# EAGLE board Sensores (EAGLE 9.7.0)

Size 168.74 x 66.59 mm. Coordinates in mm from the lower left corner, seen from the top.
Outline: 0,0 168.74,0 168.74,66.59 0,66.59 0,0
Copper layers (1*16): Top 0.035mm / dielectric 1.5mm / Bottom 0.035mm
Design rules "default": minimum track width 6mil, minimum drill 0.35mm, track to track 6mil, track to pad 6mil, pad to pad 6mil, via to via 6mil, smd to smd 6mil, copper to edge 40mil, drill to drill 6mil, minimum pad ring 10mil, minimum via ring 8mil, stop-mask expansion 4mil, vias tented up to drill 0mil, thermal gap 10mil

## Footprints (pad centres in the part's own frame; a part is rotated, then mirrored left to right if it is on the bottom)
LEDRD254W60D565H860B_G = drill 0.981 pad 1.581: 1 -1.27,0; 2 1.27,0
LEDRD254W60D565H860B = drill 0.981 pad 1.581: 1 -1.27,0; 2 1.27,0
28027 = drill 1.016 long: 1 -2.54,0; 2 0,0; 3 2.54,0
RESAD1016W63L850D250B = drill 0.83 pad 1.43: 1 -5.08,0; 2 5.08,0
ARDUINO-UNO-R3-SHIELD = drill 1.016 pad 1.88: 3.3V 24.13,-2.54; 5V 24.13,0; A0 24.13,12.7; A1 24.13,15.24; A2 24.13,17.78; A3 24.13,20.32; A4 24.13,22.86; A5 24.13,25.4; AREF -24.13,-13.97; D2 -24.13,20.32; D3 -24.13,17.78; D4 -24.13,15.24; D5 -24.13,12.7; D6 -24.13,10.16; D7 -24.13,7.62; D8 -24.13,3.81; D9 -24.13,1.27; D10 -24.13,-1.27; D11 -24.13,-3.81; D12 -24.13,-6.35; D13 -24.13,-8.89; GND@0 24.13,2.54; GND@1 24.13,5.08; GND@2 -24.13,-11.43; IOREF 24.13,-7.62; NC 24.13,-10.16; RES 24.13,-5.08; RX -24.13,25.4; SCL -24.13,-19.05; SDA -24.13,-16.51; TX -24.13,22.86; VIN 24.13,7.62

## Placement (x,y rotation side)
D1  GREEN  [LEDRD254W60D565H860B_G]  155.06,34.84 180 top
D2  RED  [LEDRD254W60D565H860B]  162.68,34.84 180 top
PIR1  PIR-SENSOR_28027  [28027]  146.17,60.24 0 top
PIR2  PIR-SENSOR_28027  [28027]  108.07,60.24 0 top
R1  300  [RESAD1016W63L850D250B]  161.41,27.22 90 top
R2  300  [RESAD1016W63L850D250B]  153.79,27.22 90 top
U4  ARDUINO-UNO-R3-SHIELD  [ARDUINO-UNO-R3-SHIELD]  47.88,29.84 270 top

## Library data of the parts
D1 = Tinkercad; CATEGORY: Opto-Electronic; SUB-CATEGORY: LED; VALUE: LED_GREEN
D2 = Tinkercad; CATEGORY: Opto-Electronic; SUB-CATEGORY: LED; VALUE: LED_RED
PIR1 PIR2 R1 R2 U4 = Tinkercad

## Nets
D1_C: D1.2 R2.2
D2_C: D2.2 R1.2
U4_5V: PIR1.2 PIR2.2 U4.5V
U4_D10: PIR2.1 U4.D10
U4_D11: PIR1.1 U4.D11
U4_D12: D1.1 U4.D12
U4_D13: D2.1 U4.D13
U4_GND: PIR1.3 PIR2.3 R1.1 R2.1 U4.GND@0 U4.GND@1 U4.GND@2

## Tracks (layer width: path | path; a pad name or v marks a point on that pad's centre or on a via)
D1_C  (1 unrouted)
D2_C  (1 unrouted)
U4_5V  (2 unrouted)
U4_D10  (1 unrouted)
U4_D11  (1 unrouted)
U4_D12  (1 unrouted)
U4_D13  (1 unrouted)
U4_GND  (6 unrouted)